# Altium PCB project-pcb.PcbDoc
Units mil, origin at the board's own origin, x right, y up, seen from the top; angles counter-clockwise.
Board outline 1850 x 950 mil, 4 copper layers (Top Layer, Layer 1, Layer 2, Bottom Layer), stack 23.712 mil thick; 11 components, 28 nets, 76 pads, 0 vias.
Unrouted connection lines stored in the file: 45.
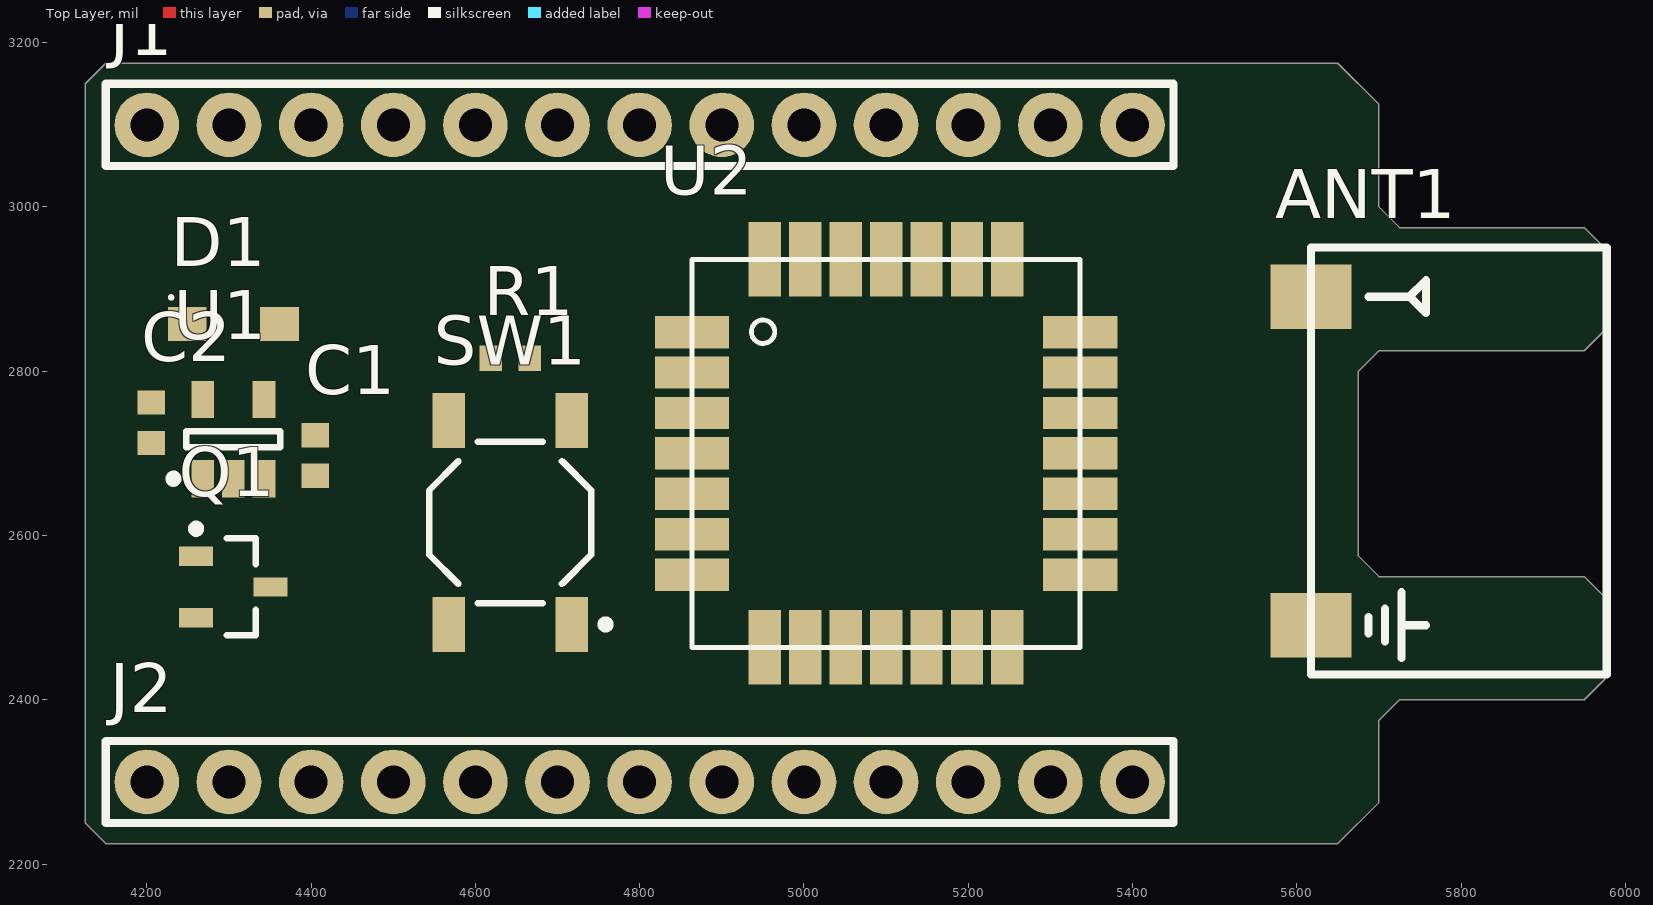
[diagram p0: Top Layer view]
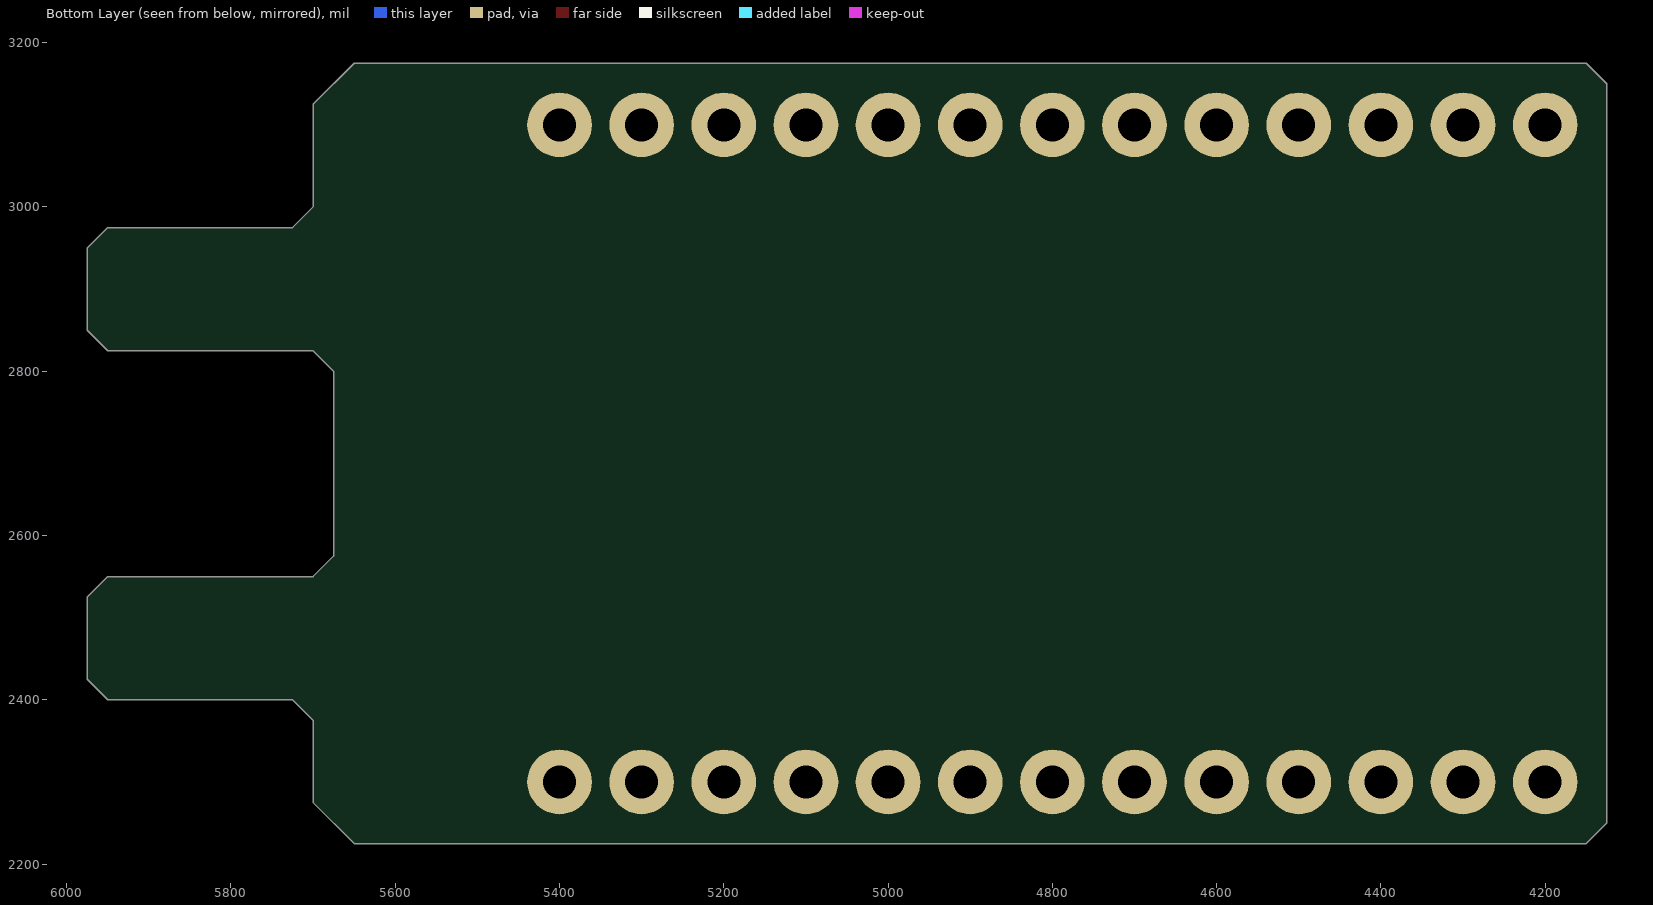
[diagram p1: Bottom Layer view, seen from below]
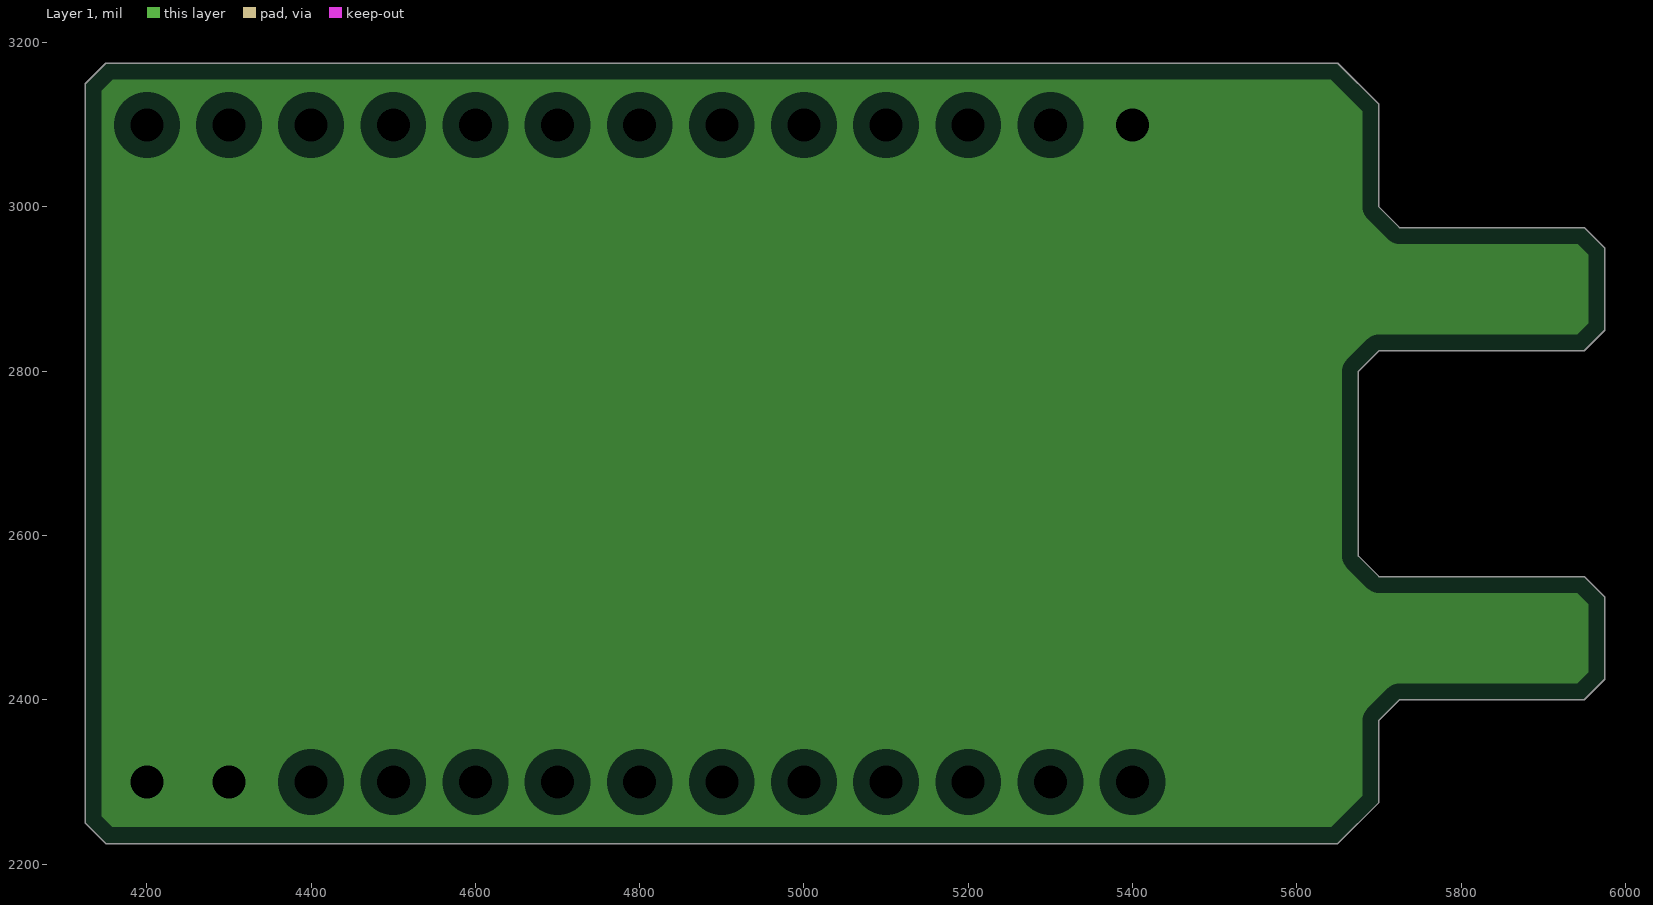
[diagram p2: Layer 1, clearances drawn from the general rule]
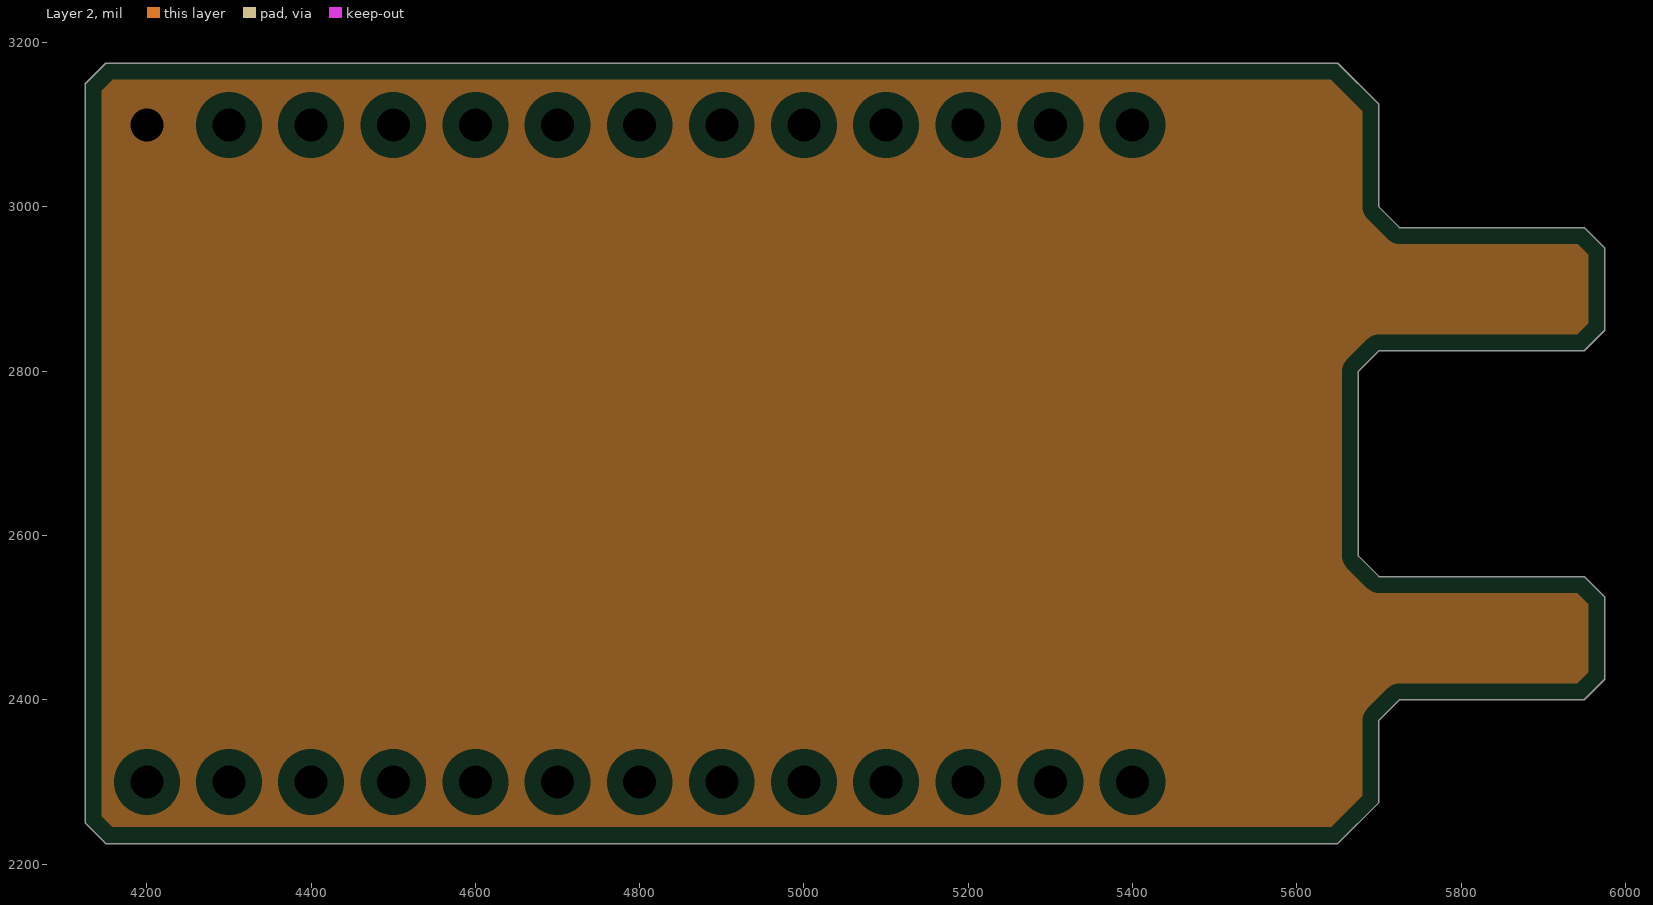
[diagram p3: Layer 2, clearances drawn from the general rule]

## Layer stack, top to bottom
Top Solder: solder mask 0.4, Solder Resist, Dk 3.5
Top Layer: signal copper 1.378
Dielectric 2: prepreg 2.8, PP-006, Dk 4.1
Layer 1: plane copper 1.378, net GND
Dielectric 1: dielectric 12.6, FR-4, Dk 4.8
Layer 2: plane copper 1.378, net +3V3
Dielectric 3: prepreg 2.8, PP-006, Dk 4.1
Bottom Layer: signal copper 1.378
Bottom Solder: solder mask 0.4, Solder Resist, Dk 3.5

## Board outline
4150,2225 5650,2225 5700,2275 5700,2375 5725,2400 5950,2400 5975,2425 5975,2525 5950,2550 5700,2550 5675,2575 5675,2800 5700,2825 5950,2825 5975,2850 5975,2950 5950,2975 5725,2975 5700,3000 5700,3125 5650,3175 4150,3175 4125,3150 4125,2250

## Design rules (kind name [scope] priority, off if disabled: settings)
Clearance [All] p1: gap=10 ignorepadtopadclearanceinfootprint=FALSE except(0: Arc-Hole Track-Hole SMDPad-Hole THPad-Hole Via-Hole Fill-Hole Poly-Hole Region-Hole Text-Hole)
PlaneClearance [All] p1: clearance=20
PlaneConnect [All] p1: planeconnectstyle=Relief reliefexpansion=20 reliefentries=4 reliefconductorwidth=10 reliefairgap=10
PolygonConnect [All] p1: connectstyle=Relief reliefconductorwidth=10 reliefentries=4 polygonreliefangle="90 Angle" airgapwidth=10
RoomDefinition project-schematic [InComponentClass('project-schematic')] p1: confinementstyle=ConfineIn formatcopy=TRUE lockcomponents=FALSE outline 4100,2200 6000,2200 6000,3200 4100,3200
RoutingVias [All] p1: holewidth=28 width=50 viastyle="Through Hole" minholewidth=28 minwidth=50 maxholewidth=28 maxwidth=50
SolderMaskExpansion [All] p1: expansion=4 istentingtop=FALSE
Width [All] p1: maxlimit=10 minlimit=10 preferedwidth=10
28 further rules are at their usual default settings.

## Components (designator, comment, footprint, x,y, rotation, side; value= is the part's Value field where it differs from the comment)
ANT1 "Antenna" Linx-ANT-915-uSP410 5617.4,2690.83 r270 top
C1 "1uF" CAPACITOR_0603 4405.28,2697.4 r270 top
C2 "1uF" CAPACITOR_0603 4205.28,2737.4 r90 top
D1 "Schottky Diode" SODFL350X90-2N 4305.28,2857.4 r0 top
J1 "13 Pin Connector" "Connector-Pin-Header-2.54mm-1x13 - duplicate" 4200,3100 r90 top
J2 "13 Pin Connector" "Connector-Pin-Header-2.54mm-1x13 - duplicate" 5400,2300 r270 top
Q1 "BSS83P" INF-PG-SOT23_N 4305.28,2537.4 r0 top
R1 "470R" Resistor_0603 4642.4,2815.83 r0 top
SW1 "SPST" TL3342 4642.4,2615.83 r180 top
U1 "ADP1714AUJZ-3.3-R7" ADI-UJ-5_M 4305.28,2717.4 r90 top
U2 "LoRa-E5 Module" LoRa-e5 5100,2700 r0 top

## Footprints (in the part's own frame and the unit in brackets; to place one, negate y for a bottom-side part, rotate by r counter-clockwise, add the part's x,y. Pads: shape width x height; smd on the part's side, far side on the other; paste and mask are expansions set on the pad)
ADI-UJ-5_M [mm] "SOT23, 5-Leads, Body 2.9x1.6mm, Pitch 0.95mm, IPC Low Density"
  rect 1.15x0.7 smd: 1(-1.225,0.95) 2(-1.225,0) 3(-1.225,-0.95) 4(1.225,-0.95) 5(1.225,0.95)
  silkscreen extent -1.35,-1.45 0.25,1.97, body extent -0.8,-1.45 0.8,1.45, height 1
CAPACITOR_0603 [mm] "Chip Capacitor, 2-Leads, Body 1.60x0.78mm, IPC High Density"
  rect 0.75x0.85 smd: 1(-0.625,0) 2(0.625,0)
  body extent -0.85,-0.45 0.85,0.45, height 0.55
"Connector-Pin-Header-2.54mm-1x13 - duplicate" [mm] "2.54mm 1x13 Pin Header"
  round 2 hole 1.02: 1(0,0) 2(0,-2.54) 3(0,-5.08) 4(0,-7.62) 5(0,-10.16) 6(0,-12.7) 7(0,-15.24) 8(0,-17.78) 9(0,-20.32) 10(0,-22.86) 11(0,-25.4) 12(0,-27.94) 13(0,-30.48)
  silkscreen extent -1.27,-31.75 1.27,1.27
INF-PG-SOT23_N [mm] "SOT23, 3-Leads, Body 2.9x1.3mm, Pitch 0.95mm, IPC Medium Density"
  rect 1.05x0.6 smd: 1(-1.15,0.95) 2(-1.15,-0.95) 3(1.15,0)
  silkscreen extent -1.27,-1.5 0.7,1.92, body extent -0.7,-1.5 0.7,1.5, height 1.1
Linx-ANT-915-uSP410 [mm] "915 MHz Antenna"
  rect 2x2.5 smd: 1(-5.08,0) 2(5.08,0)
  silkscreen extent -6.6,0 6.6,9.14, body extent -6.6,0 6.6,9.14, height 2.79
LoRa-e5 [mm]
  rect 2.3x1 smd: 1(-6,3.75) 2(-6,2.5) 3(-6,1.25) 4(-6,0) 5(-6,-1.25) 6(-6,-2.5) 7(-6,-3.75) 15(6,-3.75) 16(6,-2.5) 17(6,-1.25) 18(6,0) 19(6,1.25) 20(6,2.5) 21(6,3.75)
  rect 1x2.3 smd: 8(-3.75,-6) 9(-2.5,-6) 10(-1.25,-6) 11(0,-6) 12(1.25,-6) 13(2.5,-6) 14(3.75,-6) 22(3.75,6) 23(2.5,6) 24(1.25,6) 25(0,6) 26(-1.25,6) 27(-2.5,6) 28(-3.75,6)
  silkscreen extent -6,-6 6,6, body extent -5.97,-5.97 5.97,6.1, height 2.5
Resistor_0603 [mm]
  rect 0.7x0.8 smd: 1(-0.6,0) 2(0.6,0)
  body extent -0.85,-0.45 0.85,0.45, height 0.55
SODFL350X90-2N [mm] "SODFL, 2-Leads, Body 1.60x3.50mm, IPC Medium Density"
  rect 1.2x1.05 smd: 1(-1.425,0) 2(1.425,0)
  silkscreen extent -1.97,0.78 -1.88,0.87, body extent -1.75,-0.85 1.75,0.85, height 0.9
TL3342 [mm] "Tactile Button Switch"
  rect 1x1.7 smd: 1(-1.9,3.15) 1(-1.9,-3.15) 2(1.9,3.15) 2(1.9,-3.15)
  silkscreen extent -3.07,-2.5 2.5,3.27, body extent -2.5,-2.5 2.5,2.5, height 1.5

## Part data
ANT1: library part "915 MHz Antenna", "915 MHz Antenna"
C1 C2: library part Capacitor, "Generic Capacitor"
D1: library part Diode, "Schottky Barrier Diode"
J1 J2: library part Connector-Male-1x13
Q1: library part CMP-1099-00031-1, "P-Channel SIPMOS Small-Signal-Transistor, -60 V VDS, -0.33 A ID, -55 to 150 degC, PG-SOT23, Reel, Green", Manufacturer=Infineon, ComponentLink1Description="Manufacturer URL", ComponentLink1URL=http://www.infineon.com/, ComponentLink2Description=Datasheet, ComponentLink2URL=http://www.infineon.com/dgdl/BSS83P_Rev1.5.pdf?folderId=db3a3043156fd5730115d6a107c41454&fileId=db3a304330f686060131045ae20e3ea3, ComponentLink3Description="Package Specification", ComponentLink3URL=http://www.infineon.com/dgdl/SOT23-Package_Overview.pdf?folderId=db3a30431936bc4b0119532290053c66&fileId=db3a30431936bc4b0119533468123c85, DatasheetVersion="Rev. 1.5", Green=TRUE, Halogen-free=TRUE, ID (max)="-0.33Â A", IDpuls (max)="-1.32Â A", Mounting Technology="Surface Mount", PackageDescription="3-Pin Small Outline Transistor Package, 2.9 x 1.3 mm Body, 0.95 mm Pitch", PackageReference=PG-SOT23, PackageVersion=Apr-08, Packing=Reel, PartNumber=BSS83P, Pto t (max)="0.36Â W", QG="2.38Â nC", RDS (on) (max)="2,000Â mOhm", RDS (on) (max) (@4.5V)="3,000Â mOhm", Rth="350Â K/W", VDS (max)="-60Â V", VGS(th) (max)="-2Â V", VGS(th) (min)="-1Â V"
R1: library part Resistor, "Generic 0603 Resistor"
SW1: library part "SPST Switch", "Single Pole Single Throw Switch"
U1: library part CMP-0786-00382-1, "300 mA, Low Dropout CMOS Linear Regulator, 2.5 to 5.5 V Vin, 3.3 V Vout, Industrial, 5-pin SOT23 (UJ-5), Reel", Manufacturer="Analog Devices", Preset Vout Values (V)=3.3, Supply Current IGND @ Small Load=60uA, Code_JEDEC=MO-193-AB, ComponentLink1Description="Manufacturer URL", ComponentLink1URL=http://www.analog.com/en/index.html, ComponentLink2Description=Datasheet, ComponentLink2URL=http://www.analog.com/static/imported-files/data_sheets/ADP1712_1713_1714.pdf, ComponentLink3Description="Package Specification", ComponentLink3URL=http:/www.analog.com/static/imported-files/packages/PKG_PDF/TSOT(UJ)/UJ_5.pdf, ComponentLink4Description="URL Link1", ComponentLink4URL="Product URL:http://www.analog.com/en/ADP1714/productSearch.html", DatasheetVersion="Rev. A", Iout max=300mA, Mounting Technology="Surface Mount", PackageDescription="5-Pin Thin Small Outline Transistor Package, Body 2.9 x 1.6 mm, Pitch 0.95 mm", PackageReference=UJ-5, PackageVersion="100708-A, 10/2008", Packing=Reel, PartNumber=ADP1714AUJZ-3.3-R7, Vin (max) (V)=5.5, Vin (min) (V)=2.5
U2: library part LoRa-E5, "ARM Cortex-M4 and SX126x embedded, supports LoRaWAN on EU868 & US915"

## Nets (pads, with @x,y where several pads share a name; then routed paths per layer and width w, separated by ;. In a path a pad name is that pad's centre, name@x,y a point inside that pad or via, vN(x,y) a via of type N, cw(c..) or ccw(c..) an arc to the next point about the centre after c; other vN are vias at no path point)
+3V3: D1.2 J1.1 U2.1
GND: ANT1.2 C1.1 C2.1 J1.13 J2.12 J2.13 Q1.1 R1.2 U1.2 U2.2 U2.14 U2.16 U2.22
I2C2_SCL: J2.2 U2.5
I2C2_SDA: J2.3 U2.6
LPUART1_RX: J2.4 U2.13
LPUART1_TX: J2.5 U2.12
NetC1_2: C1.2 Q1.3 U1.1 U1.3
NetC2_2: C2.2 D1.1 U1.4 U1.5
NetR1_1: R1.1 SW1.2
PA0: J1.5 U2.23
PA9: J1.6 U2.21
PB3: J1.7 U2.8
PB4: J1.8 U2.7
PB5: J1.9 U2.11
PB10: J1.10 U2.20
RESET: J1.4 U2.17
RFIO: ANT1.1 U2.15
SPI2_MISO: J2.6 U2.26
SPI2_MOSI: J2.7 U2.27
SPI2_NSS: J2.8 U2.25
SPI2_SCK: J2.9 SW1.1 U2.24
SWCLK: J1.11 U2.4
SWDIO: J1.12 U2.3
UART1_RX: J1.2 U2.9
UART1_TX: J1.3 U2.10
UART2_RX: J2.10 U2.18
UART2_TX: J2.11 U2.19
VIN: J2.1 Q1.2
pads on no net: U2.28

## Polygon pours and split planes (outlines as drawn)
GND on Layer 1 (split plane): 5679.9,3116.68 5679.9,3000 5680.29,2996.08 5681.43,2992.31 5683.29,2988.83 5685.79,2985.79 5710.79,2960.79 5713.83,2958.29 5717.31,2956.43 5721.08,2955.29 5725,2954.9 5941.68,2954.9 5954.9,2941.68 5954.9,2858.32 5941.68,2845.1 5700,2845.1 5696.08,2844.71 5692.31,2843.57 5688.83,2841.71 5685.79,2839.21 5660.79,2814.21 5658.29,2811.17 5656.43,2807.69 5655.29,2803.92 5654.9,2800 5654.9,2575 5655.29,2571.08 5656.43,2567.31 5658.29,2563.83 5660.79,2560.79 5685.79,2535.79 5688.83,2533.29 5692.31,2531.43 5696.08,2530.29 5700,2529.9 5941.68,2529.9 5954.9,2516.68 5954.9,2433.32 5941.68,2420.1 5725,2420.1 5721.08,2419.71 5717.31,2418.57 5713.83,2416.71 5710.79,2414.21 5685.79,2389.21 5683.29,2386.17 5681.43,2382.69 5680.29,2378.92 5679.9,2375 5679.9,2283.32 5641.68,2245.1 4158.32,2245.1 4145.1,2258.32 4145.1,3141.68 4158.32,3154.9 5641.68,3154.9
+3V3 on Layer 2 (split plane): 5679.9,3116.68 5679.9,3000 5680.29,2996.08 5681.43,2992.31 5683.29,2988.83 5685.79,2985.79 5710.79,2960.79 5713.83,2958.29 5717.31,2956.43 5721.08,2955.29 5725,2954.9 5941.68,2954.9 5954.9,2941.68 5954.9,2858.32 5941.68,2845.1 5700,2845.1 5696.08,2844.71 5692.31,2843.57 5688.83,2841.71 5685.79,2839.21 5660.79,2814.21 5658.29,2811.17 5656.43,2807.69 5655.29,2803.92 5654.9,2800 5654.9,2575 5655.29,2571.08 5656.43,2567.31 5658.29,2563.83 5660.79,2560.79 5685.79,2535.79 5688.83,2533.29 5692.31,2531.43 5696.08,2530.29 5700,2529.9 5941.68,2529.9 5954.9,2516.68 5954.9,2433.32 5941.68,2420.1 5725,2420.1 5721.08,2419.71 5717.31,2418.57 5713.83,2416.71 5710.79,2414.21 5685.79,2389.21 5683.29,2386.17 5681.43,2382.69 5680.29,2378.92 5679.9,2375 5679.9,2283.32 5641.68,2245.1 4158.32,2245.1 4145.1,2258.32 4145.1,3141.68 4158.32,3154.9 5641.68,3154.9

## Silkscreen, mask and mechanical layers (free items; w line width, h text height)
Drill Guide:
  the board outline again, w10